# Altium PCB JacdacButton 10.PcbDoc
Units mm, origin at the board's own origin, x right, y up, seen from the top; angles counter-clockwise.
Board outline 14 x 28.2 mm, 2 copper layers (Top Layer, Bottom Layer), stack 1.525 mm thick; 22 components, 9 nets, 68 pads, 10 vias.
Unrouted connection lines stored in the file: 10.
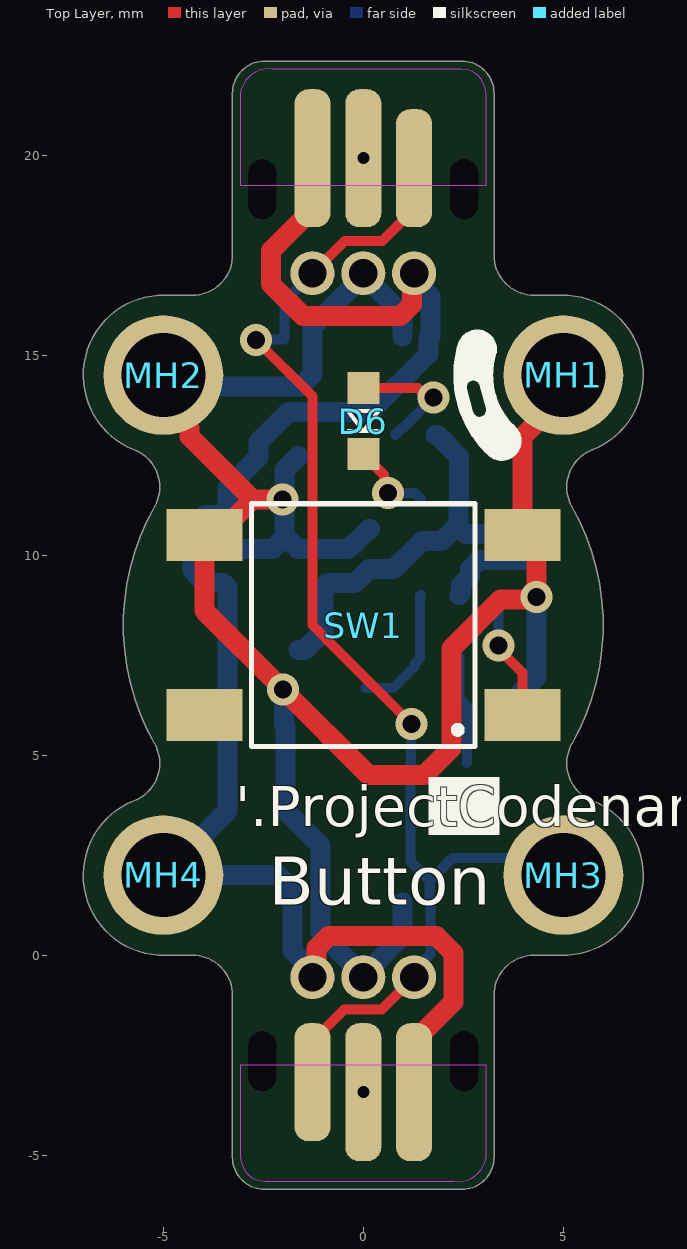
[diagram p0: Top Layer view]
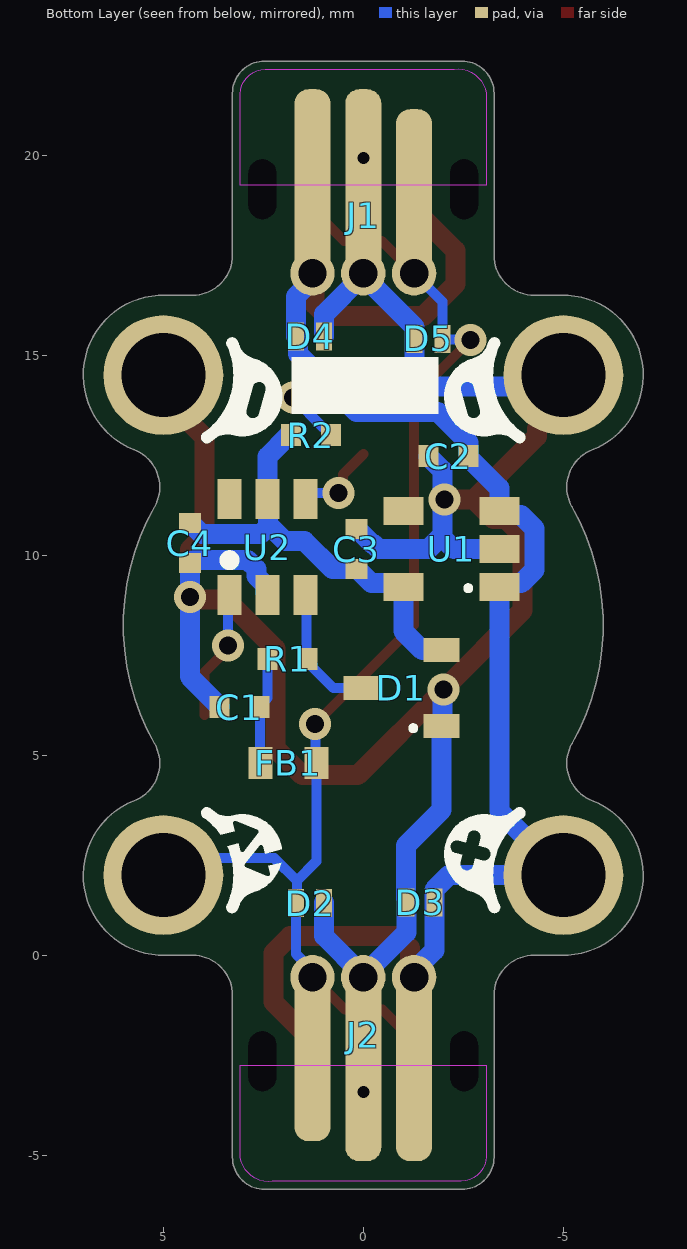
[diagram p1: Bottom Layer view, seen from below]

## Layer stack, top to bottom
Top Solder: solder mask 0.0102, Solder Resist, Dk 3.5
Top Layer: signal copper 0.0356
Dielectric 1: core 1.454, FR-4, Dk 4.2
Bottom Layer: signal copper 0.0356
Bottom Solder: solder mask 0.0102, Solder Resist, Dk 3.5

## Board outline
-4.95,0 -4.27,0 cw(c-4.27,-1) -3.27,-1 -3.27,-5.05 ccw(c-2.471,-5.051) -2.47,-5.85 2.47,-5.85 ccw(c2.471,-5.051) 3.27,-5.05 3.27,-1 cw(c4.27,-1) 4.27,0 4.95,0 ccw(c5,2) 5.726,3.864 cw(c6.089,4.796) 5.219,5.29 ccw(c0,8.25) 5.219,11.21 cw(c6.089,11.704) 5.726,12.636 ccw(c5,14.5) 4.95,16.5 4.27,16.5 cw(c4.27,17.5) 3.27,17.5 3.27,21.55 ccw(c2.471,21.551) 2.47,22.35 -2.47,22.35 ccw(c-2.471,21.551) -3.27,21.55 -3.27,17.5 cw(c-4.27,17.5) -4.27,16.5 -4.95,16.5 ccw(c-5,14.5) -5.726,12.636 cw(c-6.089,11.704) -5.219,11.21 ccw(c0,8.25) -5.219,5.29 cw(c-6.089,4.796) -5.726,3.864 ccw(c-5,2)

## Design rules (kind name [scope] priority, off if disabled: settings)
AssemblyTestPointUsage [All] p1: valid=2
BoardOutlineClearance [All] p1: gap=0.3 ignorepadtopadclearanceinfootprint=FALSE except(0: Arc-SplitContinuation Track-SplitContinuation SMDPad-SplitContinuation THPad-SplitContinuation Via-SplitContinuation Fill-SplitContinuation Poly-SplitContinuation Region-OutlineEdge Region-SplitContinuation Text-OutlineEdge Text-SplitContinuation; 0.2: Track-OutlineEdge Fill-CavityEdge Fill-CutoutEdge Fill-SplitBarrior Poly-CavityEdge Poly-CutoutEdge Poly-SplitBarrior Text-CavityEdge Text-CutoutEdge Text-SplitBarrior; 0.25: SMDPad-OutlineEdge)
Clearance [All] p1: gap=0.125 ignorepadtopadclearanceinfootprint=FALSE except(0: Arc-Hole Track-Hole SMDPad-Hole THPad-Hole Via-Hole Fill-Hole Poly-Hole Region-Hole Text-Hole)
ComponentClearance [All] p1: gap=0.1 collisioncheckmode=3 verticalgap=0.254 showdistances=FALSE
DiffPairsRouting [All] p1: maxlimit=2 minlimit=0.15 mostfreqgap=0.15 toplayer_minwidth=0.15 toplayer_maxwidth=2 toplayer_prefwidth=0.15 bottomlayer_minwidth=0.15 bottomlayer_maxwidth=2 bottomlayer_prefwidth=0.15 substack1={CB9D278B-8BF5-444A-AAF4-837A2A9DF42D} toplayer_{cb9d278b-8bf5-444a-aaf4-837a2a9df42d}_minwidth=0.381 toplayer_{cb9d278b-8bf5-444a-aaf4-837a2a9df42d}_maxwidth=0.381 toplayer_{cb9d278b-8bf5-444a-aaf4-837a2a9df42d}_prefwidth=0.381 bottomlayer_{cb9d278b-8bf5-444a-aaf4-837a2a9df42d}_minwidth=0.381 bottomlayer_{cb9d278b-8bf5-444a-aaf4-837a2a9df42d}_maxwidth=0.381 bottomlayer_{cb9d278b-8bf5-444a-aaf4-837a2a9df42d}_prefwidth=0.381 substack2={826B8647-A721-4255-895A-19F9591B9CD1} toplayer_{826b8647-a721-4255-895a-19f9591b9cd1}_minwidth=0.381 toplayer_{826b8647-a721-4255-895a-19f9591b9cd1}_maxwidth=0.381 toplayer_{826b8647-a721-4255-895a-19f9591b9cd1}_prefwidth=0.381 bottomlayer_{826b8647-a721-4255-895a-19f9591b9cd1}_minwidth=0.381 bottomlayer_{826b8647-a721-4255-895a-19f9591b9cd1}_maxwidth=0.381 bottomlayer_{826b8647-a721-4255-895a-19f9591b9cd1}_prefwidth=0.381 substack3={E64FCAF4-1BC8-437D-B1E0-0E5F2DC0F59E} toplayer_{e64fcaf4-1bc8-437d-b1e0-0e5f2dc0f59e}_minwidth=0.381 toplayer_{e64fcaf4-1bc8-437d-b1e0-0e5f2dc0f59e}_maxwidth=0.381 toplayer_{e64fcaf4-1bc8-437d-b1e0-0e5f2dc0f59e}_prefwidth=0.381 bottomlayer_{e64fcaf4-1bc8-437d-b1e0-0e5f2dc0f59e}_minwidth=0.381 bottomlayer_{e64fcaf4-1bc8-437d-b1e0-0e5f2dc0f59e}_maxwidth=0.381 bottomlayer_{e64fcaf4-1bc8-437d-b1e0-0e5f2dc0f59e}_prefwidth=0.381 substack4={E61CE66C-507C-4E1E-8E83-C905434AFC1C} toplayer_{e61ce66c-507c-4e1e-8e83-c905434afc1c}_minwidth=0.381 toplayer_{e61ce66c-507c-4e1e-8e83-c905434afc1c}_maxwidth=0.381 toplayer_{e61ce66c-507c-4e1e-8e83-c905434afc1c}_prefwidth=0.381 bottomlayer_{e61ce66c-507c-4e1e-8e83-c905434afc1c}_minwidth=0.381 bottomlayer_{e61ce66c-507c-4e1e-8e83-c905434afc1c}_maxwidth=0.381 bottomlayer_{e61ce66c-507c-4e1e-8e83-c905434afc1c}_prefwidth=0.381 maxuncoupledlength=25
FabricationTestPointUsage [All] p1: valid=2 allowmultiple=FALSE
HoleSize [All] p1: absolutevalues=TRUE maxlimit=2.54 minlimit=0.2 maxpercent=80.000 minpercent=20.000
MinimumSolderMaskSliver [All] p1: minsoldermaskwidth=0.005
PlaneClearance [All] p1: clearance=0.3
PlaneConnect [All] p1: planeconnectstyle=Relief reliefexpansion=0.5 reliefentries=4 reliefconductorwidth=0.2 reliefairgap=0.3
PolygonConnect "PolygonConnect GND" [isVIA] p1: connectstyle=Relief reliefconductorwidth=0.2 reliefentries=4 polygonreliefangle="90 Angle" airgapwidth=0.2
PolygonConnect [All] p2: connectstyle=Relief reliefconductorwidth=0.2 reliefentries=4 polygonreliefangle="90 Angle" airgapwidth=0.2
RoutingVias [All] p1: holewidth=0.3 width=0.6 viastyle="Through Hole" minholewidth=0.3 minwidth=0.6 maxholewidth=0.5 maxwidth=0.8
SilkToSilkClearance [All] p1: silktosilkclearance=0.001
SilkToSolderMaskClearance [IsPad] p1: minsilkscreentomaskgap=0.05 clearancetoexposedcopper=TRUE
SolderMaskExpansion [All] p1: expansion=0.075 istentingtop=FALSE
Width [All] p1: maxlimit=2 minlimit=0.15 preferedwidth=0.15 substack1={CB9D278B-8BF5-444A-AAF4-837A2A9DF42D} substack2={826B8647-A721-4255-895A-19F9591B9CD1} substack3={E64FCAF4-1BC8-437D-B1E0-0E5F2DC0F59E} substack4={E61CE66C-507C-4E1E-8E83-C905434AFC1C} minimp=50.000000 maximp=50.000000 favimp=50.000000
20 further rules are at their usual default settings.

## Components (designator, comment, footprint, x,y, rotation, side; value= is the part's Value field where it differs from the comment)
C1 "CL05C330JB5NNNC" "C0402_0.55MM - without outline" 3.1,6.2 r180 bottom
C2 "CL05A105KP5NNNC" "C0402_0.55MM - without outline" -2.125,12.475 r180 bottom
C3 "CL05A105KP5NNNC" "C0402_0.55MM - without outline" 0.17,10.15 r270 bottom
C4 "CL05A105KP5NNNC" "C0402_0.55MM - without outline" 4.335,10.3 r90 bottom
D1 "BAT54S" "NXP-BAT54S-TO-236AB - WITHOUT OUTLINE" -0.95,6.675 r0 bottom
D2 "RCLAMP0521P-N" "TVS 0402 - L" 1.327,1.3 r180 bottom
D3 "RCLAMP0521P-N" "TVS 0402 - L" -1.425,1.319 r0 bottom
D4 "RCLAMP0521P-N" "TVS 0402 - L" 1.329,15.463 r180 bottom
D5 "RCLAMP0521P-N" "TVS 0402 - L" -1.625,15.409 r0 bottom
D6 "Everlight Elec'''" "0603 Orange - without outline" 0,13.35 r90 top
FB1 "TDK MPZ1608S102ATA00" "TDK MPZ1608 0.8mm - without outline" 1.875,4.8 r0 bottom
J1 "3 pin JACDAC edge connector" JACDAC_EDGE_CONNECTOR_NO_TRACES 0,16.5 r180 bottom
J2 "3 pin JACDAC edge connector" JACDAC_EDGE_CONNECTOR_NO_TRACES 0,0 r0 bottom
MH1 "MH_5.0MMK_3.0MMC_2.1MMD_PTH" MH_5.0MMK_3.0MMC_2.1MMD_PTH 5,14.5 r0 top
MH2 "MH_5.0MMK_3.0MMC_2.1MMD_PTH" MH_5.0MMK_3.0MMC_2.1MMD_PTH -5,14.5 r180 top
MH3 "MH_5.0MMK_3.0MMC_2.1MMD_PTH" MH_5.0MMK_3.0MMC_2.1MMD_PTH 5,2 r0 top
MH4 "MH_5.0MMK_3.0MMC_2.1MMD_PTH" MH_5.0MMK_3.0MMC_2.1MMD_PTH -5,2 r180 top
R1 "RC0402FR-07220RL" "R0402 - Without outline" 1.9,7.4 r0 bottom
R2 "RC0402FR-071KL" "R0402 - Without outline" 1.312,13 r0 bottom
SW1 "Tact Wurth 430152050826" "Wurth 430152050836-WIDE" 0,8.25 r180 top
U1 "LDO 3.3V/300 mA" "ON_SEMI-SOT23-5 - WITHOUT OUTLINE" -2.2,10.15 r0 bottom
U2 "PMS150C" SOT23-6 2.395,10.2 r90 bottom

## Footprints (in the part's own frame and the unit in brackets; to place one, negate y for a bottom-side part, rotate by r counter-clockwise, add the part's x,y. Pads: shape width x height; smd on the part's side, far side on the other; paste and mask are expansions set on the pad)
"0603 Orange - without outline" [mm]
  rect 0.8x0.8 smd paste-0.05: 1(-0.825,0) 2(0.825,0)
  silkscreen extent -0.25,-0.38 0.25,0.38, body extent -0.8,-0.4 0.8,0.4, height 0.54
"C0402_0.55MM - without outline" [mm]
  rect 0.5x0.55 smd: 1(-0.5,0) 2(0.5,0)
  body extent -0.5,-0.25 0.5,0.25, height 0.55
JACDAC_EDGE_CONNECTOR_NO_TRACES [mm] "JacDac 3 pin connector with no traces"
  rrect78% 0.9x2.95 smd far side paste-1 mask+0: 1(-1.27,3.175)
  round 1.11 / inner round 0.71 / far side round 1.1 hole 0.71 paste-0.254 mask+0: 1(1.27,0.55) 2(0,0.55) 3(-1.27,0.55)
  rrect78% 0.9x4.3 smd paste-1 mask+0: 1(1.27,2.5)
  rrect78% 0.9x4.8 smd paste-1 mask+0: 2(0,2.75) 3(-1.27,2.75)
  rrect78% 0.9x3.45 smd far side paste-1 mask+0: 2(0,3.425) 3(1.27,3.425)
  round 0 hole 0.7 slot 1.5 at 90 deg unplated: ""(-2.52,2.65) ""(2.52,2.65)
  Top Layer keep-out region: -3.075,2.75 -3.07,5.033 -2.987,5.341 -2.761,5.567 -2.453,5.65 -2.453,5.65 2.27,5.65 2.545,5.635 2.794,5.516 2.978,5.31 3.07,5.05 3.07,5.05 3.07,2.75
  Bottom Layer lines w0.2: -1.126,0.85 -1.27,0.85
  Bottom Layer keep-out region: -3.07,2.75 -3.07,5.033 -3.023,5.269 -2.889,5.469 -2.689,5.603 -2.453,5.65 -2.453,5.65 2.27,5.65 2.545,5.635 2.794,5.516 2.978,5.31 3.07,5.05 3.07,5.05 3.07,2.75
MH_5.0MMK_3.0MMC_2.1MMD_PTH [mm] "Mounting Hole 5.0mm clearance, 3.1 annualar ring and 2.1mm PTH"
  round 3 hole 2.1 mask+0.05: 1(0,0)
"NXP-BAT54S-TO-236AB - WITHOUT OUTLINE" [mm] "SOT23, 3-Leads, Body 2.90x2.30mm, Pitch 0.95mm, IPC Medium Density"
  rect 0.9x0.6 smd: 1(-1,0.95) 2(-1,-0.95) 3(1,0)
  silkscreen extent -0.35,0.95 -0.25,1.05, body extent -1.32,-1.5 1.32,1.5, height 1.12
"ON_SEMI-SOT23-5 - WITHOUT OUTLINE" [mm]
  rect 1x0.7 smd: 1(-1.2,0.95) 2(-1.2,0) 3(-1.2,-0.95) 4(1.2,-0.95) 5(1.2,0.95)
  silkscreen extent -0.47,0.93 -0.38,1.02, body extent -1.5,-1.57 1.5,1.58, height 1.1
"R0402 - Without outline" [mm]
  rect 0.5x0.55 smd: 1(-0.5,0) 2(0.5,0)
  body extent -0.5,-0.25 0.5,0.25, height 0.35
SOT23-6 [mm] "SOT23, 6-Leads, Body 2.90x2.45mm, Pitch 0.95mm, IPC Medium Density"
  rect 1x0.6 smd: 1(-1.2,0.95) 2(-1.2,0) 3(-1.2,-0.95) 4(1.2,-0.95) 5(1.2,0) 6(1.2,0.95)
  silkscreen extent -0.42,0.85 -0.23,1.05, body extent -1.4,-1.45 1.4,1.45, height 1.45
"TDK MPZ1608 0.8mm - without outline" [mm]
  rect 0.6x0.8 smd paste-0.1: 1(-0.7,0) 2(0.7,0)
  body extent -0.8,-0.4 0.8,0.4, height 0.8
"TVS 0402 - L" [mm] "TVS 0402 RoHS"
  rect 0.4x0.7 smd paste-0.038 mask+0.05: 1(-0.35,0) 2(0.35,0)
  body extent -0.5,-0.3 0.5,0.3, height 0.5
"Wurth 430152050836-WIDE" [mm] "6*6mm vertical type, SMD, height 5.0mm, black actuator, 160gf, T&R"
  rect 1.9x1.3 smd: 1(-3.975,2.25) 2(-3.975,-2.25) 3(3.975,2.25) 4(3.975,-2.25)
  silkscreen extent -2.79,-3.04 2.79,3.04, body extent -4.5,-3.1 4.5,3.1, height 5

## Part data
C1: "CAP CER 33PF 50V C0G/NP0 0402", Capacitance=33pF, Case Code (Imperial)=0402, Case Code (Metric)=1005, Dielectric=C0G, Manufacturer=Samsung, Max Operating Temperature=125°C, Min Operating Temperature=-55°C, Package Quantity=1, Supplier Part Number 1=1276-1272-1-ND, Temperature Coefficient=300ppm/°C, Tolerance=5%, Voltage=50V, Case/Package=0402, Category="Ceramic Capacitors", ComponentLink1Description="Online datasheet", ComponentLink1URL=https://datasheet.ciiva.com/15195/getdatasheetpartid-355282-15195687.pdf, Construction=Flat, Contact Plating=Tin, Depth=0.5mm, Height=0.5mm, Lead Free="Lead Free", Length=1mm, Manufacturer Part Number=CL05C330JB5NNNC, Material=Ceramic, Mount="Surface Mount", Packaging="Tape and Reel", Pricing 1="1=0.10000, 10=0.02300, 50=0.01260, 100=0.01040, 500=0.00740, 1000=0.00582, 2500=0.00529, 5000=0.00487 (USD)", Pricing 2="1=0.12500, 25=0.02900, 100=0.01300, 250=0.01100, 500=0.00900, 1000=0.00600 (USD)", Pricing 3="1=0.10000, 10=0.01400, 50=0.01400, 100=0.01100, 1000=0.00600, 10000=0.00400 (USD)", Pricing 4="150=0.01120, 500=0.00860, 2500=0.00640, 5000=0.00550 (GBP)", Radiation Hardening=No, RoHS=Yes, RoHS Compliant=Yes, Series=CL, Stock 1=5436088, Stock 2=45340, Stock 3=8877, Stock 4=10934, Supplier 1=Digi-Key, Supplier 2=Newark, Supplier 3=Mouser, Supplier 4=Farnell, Supplier Part Number 2=82AC9259, Supplier Part Number 3=187-CL05C330JB5NNNC, Supplier Part Number 4=3013373RL, Thickness=0.022inch, Voltage Rating=50V, Voltage Rating (DC)=50V, Width=0.02inch
C2 C3 C4: "CAP CER 1UF 10V X5R 0402", Capacitance=1µF, Case Code (Imperial)=0402, Case Code (Metric)=1005, Dielectric=X5R, Manufacturer=Samsung, Max Operating Temperature=85°C, Min Operating Temperature=-55°C, Package Quantity=1, Supplier Part Number 1=1276-1076-1-ND, Tolerance=10%, Voltage Rating=10V, Case/Package=0402, Category=Capacitors, Checked=?, ComponentLink1Description="Online datasheet", ComponentLink1URL=https://datasheet.ciiva.com/15195/getdatasheetpartid-358390-15195630.pdf, Contact Plating=Tin, Created=DG, Depth=0.5mm, Height=0.5mm, Length=1mm, Manufacturer Part Number=CL05A105KP5NNNC, Material=Ceramic, Mount="Surface Mount", Packaging="Tape and Reel", Pricing 1="1=0.10000, 10=0.03900, 50=0.02100, 100=0.01720, 500=0.01228, 1000=0.00965, 2500=0.00877, 5000=0.00807 (USD)", Pricing 2="1=0.10000, 10=0.04200, 100=0.01800, 500=0.01300, 1000=0.01000, 2500=0.00900 (USD)", Pricing 3="10=0.02450, 100=0.02000, 500=0.01310, 2500=0.00920, 5000=0.00810, 10000=0.00640, 50000=0.00490 (GBP)", Radiation Hardening=No, RoHS=Yes, Stock 1=5705569, Stock 2=928941, Stock 3=53670, Supplier 1=Digi-Key, Supplier 2=Mouser, Supplier 3=Farnell, Supplier Part Number 2=187-CL05A105KP5NNNC, Supplier Part Number 3=3013329, Thickness=0.022inch, Width=0.02inch
D1: "DIODE ARRAY SCHOTTKY 30V SOT23", Manufacturer=Nexperia, Manufacturer Part Number=BAT54S,235, Supplier Part Number 1=1727-1868-1-ND, Category="Rectifier Diodes", ComponentLink1Description="NXP datasheet online", ComponentLink1URL=https://assets.nexperia.com/documents/data-sheet/BAT54_SER.pdf, Pricing 1="1=0.13000, 10=0.11900, 100=0.05610, 500=0.03326, 1000=0.02185, 5000=0.02138 (USD)", RoHS=No, Stock 1=14011, Supplier 1=Digi-Key, Supplier 2=Mouser, Supplier 3=RSComponents, Supplier Part Number 2=771-BAT54S235, Supplier Part Number 3=1707990
D2 D3 D4 D5: "Bidirectional 5V (Max) 6V 16V 3.5A (8/20us) 0402 TVS RoHS", Manufacturer="Born Semiconductor", Package=0402, Supplier1 Part Number=C316043, Checked By=?, ComponentLink1Description="Online datasheet", ComponentLink1URL=https://datasheet.lcsc.com/szlcsc/Bourne-Semicon-Shenzhen-RCLAMP0521P-N_C316043.pdf, Created By="D Gakure", Manufacturer Part Number=RCLAMP0521P-N, Supplier1=LCSC
D6: library part 19-217/S2C-AQ1R1B/3T, "LED ORANGE DIFFUSED 1608 SMD", Case Code (Imperial)=0603, Case Code (Metric)=1608, Color=Orange, Forward Voltage=2.05V, Lens Color=White, Manufacturer="Everlight Elec", Supplier 1 Part Number=C146215, Test Current=25mA, Case/Package=0603, Category=LEDs, Colour=Orange, ComponentLink1Description="Online datasheet", ComponentLink1URL=https://datasheet.lcsc.com/lcsc/1912171731_Everlight-Elec-19-217-S2C-AQ1R1B-3T_C146215.pdf, Dominant Wavelength=605nm, Height=0.65mm, Lead Free="Lead Free", Length=1.6mm, Lens Transparency=Diffused, Luminous Intensity=100mcd, Manufacturer Part Number=19-217/S2C-AQ1R1B/3T, Mount="Surface Mount", RoHS=Yes, Supplier 1=LCSC, Width=0.8mm
FB1: "0603 1k@100MHz 0.8A chip", Case Code (Imperial)=0603, Case Code (Metric)=1608, Current Rating=800mA, DC Resistance (DCR)=300mR, Manufacturer=TDK, Manufacturer Part Number=MPZ1608S102ATA00, Package Quantity=4000, Supplier Part Number 1=445-8694-1-ND, Tolerance=25%, Case/Package=0603, ComponentLink2Description="datasheet online", ComponentLink2URL=https://www.mouser.co.uk/datasheet/2/400/eads_commercial_power_mpz1608_en-923650.pdf, ComponentLink3Description=datasheet, ComponentLink3URL="Y:\System\Altium\Libraries 2014\TDK\Datasheets\eads_commercial_power_mpz1608_en-923650.pdf", Core Material=Ferrite, Height=0.037inch, Impedance="1kR @ 100MHz", Length=0.063inch, Max DC Current=800mA, Mount="Surface Mount", Packaging="Tape and Reel", Pricing 1="1=0.1, 10=0.079, 25=0.0716, 50=0.0644, 100=0.0472, 250=0.03432, 500=0.03146, 1000=0.02717 (USD)", Stock 1=113542, Supplier 1=Digi-Key, Supplier 2=Mouser, Supplier Part Number 2=810-MPZ1608S102ATA00, Width=0.031inch
J1 J2: library part "Jacdac edge connector", "3 pin Jacdac edge connector 1.27mm pitch", Manufacturer Part Number=JACDAC_EDGE_CONNECTOR, Checked By=?, ComponentLink1Description="Yuliang JACDAC cable connector drawing online", ComponentLink1URL=https://github.com/microsoft/jacdac-mdk/blob/main/connector/JACDAC-Connector-by-Yuliang-2020-11-28.pdf, ComponentLink2Description="JACDAC PCB edge connector spec onlin", ComponentLink2URL=https://github.com/microsoft/jacdac-mdk/blob/main/connector/JACDAC_PCB_Edge_Connector_Drawing_JD-PEC-01_rev_01.pdf, Created By="D. Gakure", PCB Type="1.6mm FR4"
MH1 MH2 MH3 MH4: "Mounting Hole 5.0mm keepout, 3.0mm annualar ring and 2.1mm Drill PTH"
R1: "RES SMD 220 OHM 1% 1/16W 0402", Case Code (Imperial)=0402, Case Code (Metric)=1005, Manufacturer=Yageo, Max Operating Temperature=155°C, Max Power Dissipation=63mW, Min Operating Temperature=-55°C, Package Quantity=1, Power Rating=62.5mW, Resistance=220R, Resistor Type="Thick Film", Supplier Part Number 1=311-220LRCT-ND, Temperature Coefficient=100ppm/°C, Tolerance=1%, Voltage Rating=50V, Case/Package=0402, Category=Resistors, Checked=?, ComponentLink1Description="Online datasheet", ComponentLink1URL=https://datasheet.ciiva.com/11819/0900766b80c66297-11819466.pdf, Created=D.G, Depth=0.5mm, Features="Moisture Resistant", Height=0.016inch, Lead Free="Lead Free", Length=1mm, Manufacturer Part Number=RC0402FR-07220RL, Military Standard=Not, Number of Pins=2, Number of Terminations=2, Packaging="Tape and Reel", Pricing 1="1=0.10000, 10=0.01400, 100=0.00580, 1000=0.00262, 2500=0.00228, 5000=0.00188 (USD)", Pricing 2="1=0.10000, 10=0.01200, 100=0.00400, 1000=0.00400, 2500=0.00400, 10000=0.00300 (USD)", Pricing 3="1=0.08130, 25=0.01210, 100=0.01120, 250=0.01030, 500=0.00900 (GBP)", REACH SVHC="No SVHC", RoHS=Yes, Stock 1=1286042, Stock 2=324625, Stock 3=18234, Supplier 1=Digi-Key, Supplier 2=Mouser, Supplier 3=Farnell, Supplier Part Number 2=603-RC0402FR-07220RL, Supplier Part Number 3=2147864, Termination=SMD/SMT, Voltage Rating (DC)=50V, Width=0.02inch
R2: "RES SMD 1K OHM 1% 1/16W 0402", Case Code (Imperial)=0402, Case Code (Metric)=1005, Manufacturer=Yageo, Max Operating Temperature=155°C, Min Operating Temperature=-55°C, Power Rating=62.5mW, Resistance=1kR, Resistor Type="Thick Film", Supplier Part Number 1=311-1.00KLRDKR-ND, Temperature Coefficient=100ppm/°C, Tolerance=1%, Voltage Rating=50V, Case/Package=0402, Category=Resistors, Checked=?, ComponentLink2Description="Online datasheet", ComponentLink2URL=https://datasheet.ciiva.com/12666/pyu-rc0402-51-rohs-l-6-r-12666741.pdf, Created=D.G, Depth=0.5mm, Height=0.32mm, Lead Free="Lead Free", Length=1mm, Manufacturer Part Number=RC0402FR-071KL, Military Standard=Not, Number of Pins=2, Packaging="Tape and Reel", Pricing 1="1=0.10000, 10=0.01400, 100=0.00580, 1000=0.00262, 2500=0.00228, 5000=0.00188 (USD)", Pricing 2="1=0.10000, 10=0.01200, 100=0.00400, 1000=0.00400, 2500=0.00400, 10000=0.00300 (USD)", Pricing 3="1=0.08130, 25=0.01210, 100=0.01120, 250=0.01030, 500=0.00900 (GBP)", REACH SVHC=Unknown, RoHS=Yes, Stock 1=37591306, Stock 2=11912978, Stock 3=29900, Supplier 1=Digi-Key, Supplier 2=Mouser, Supplier 3=Farnell, Supplier Part Number 2=603-RC0402FR-071KL, Supplier Part Number 3=2132441, Termination=SMD/SMT, Voltage Rating (DC)=50V, Width=0.5mm
SW1: "6x6mm SPST 0.05A 12VDC SMD 260gf", Contact Current Rating=50mA, Manufacturer="Wurth Electronics", Manufacturer Part Number=430152050826, Max Operating Temperature=85°C, Min Operating Temperature=-40°C, Operating Force=260gf, Supplier Part Number 1=732-6993-1-ND, Actuator Length=1.6mm, Actuator Material="Polymer,Liquid Crystal Polymer", Actuator Type=Standard, ComponentLink1Description="Online datasheet", ComponentLink1URL=http://www.farnell.com/datasheets/1910150.pdf, Contact Material="Stainless Steel,Steel", Current Rating=50mA, Height=5mm, Illumination Type=Non-Illuminated,Illuminated, Length=6.2mm, Mechanical Life=200000Cycles, Mount="Surface Mount", Packaging="Tape and Reel", Pricing 1="1=0.47, 500=0.38232 (USD)", REACH SVHC="No SVHC", Stock 1=2282, Supplier 1=Digi-Key, Supplier 2=Farnell, Supplier 3=RSComponents, Supplier Part Number 2=2065110, Supplier Part Number 3=7856213, Switch Function=Off-Mom, Switch Travel=0.25mm, Termination="Gull Wing", Throw Configuration=SPST, Width=6.2mm
U1: library part NCP114BSN330T1G, "CMOS Low Dropout Regulator (LDO), 300 mA 3.3V, Non-Active Discharge, TSOP5", Case/Package=TSOP, Manufacturer="ON Semiconductor", Max Input Voltage=5.5V, Max Operating Temperature=85°C, Max Output Current=300mA, Min Input Voltage=1.7V, Min Operating Temperature=-40°C, Output Voltage=3.3V, Quiescent Current=50uA, Supplier Part Number 1=NCP114BSN330T1GOSCT-ND, Accuracy=2%, Category="Voltage Regulators - Linear", ComponentLink1Description="Datasheet (online)", ComponentLink1URL=http://www.farnell.com/datasheets/2118270.pdf?src-supplier=Farnell, Lead Free="Lead Free", Manufacturer Part Number=NCP114BSN330T1G, Mount="Surface Mount", Number of Outputs=1, Number of Pins=5, Output Type=Fixed, Polarity=Positive, Pricing 1="1=0.45000, 10=0.33700, 25=0.29440, 100=0.19060, 250=0.15780, 500=0.12624, 1000=0.09679 (USD)", RoHS=Yes, RoHS Compliant=Yes, Stock 1=4067, Supplier 1=Digi-Key, Supplier 2=Mouser, Supplier 3=RSComponents, Supplier Part Number 2=863-NCP114BSN330T1G, Supplier Part Number 3=1263179
U2: "8bit OTP Type IO Controller", Manufacturer=PADAUK, Manufacturer Part Number=PMS150C-U6, Package=SOT-23-6, Supplier Part Number 1=C168658, ComponentLink1Description="Padauk datasheet online", ComponentLink1URL=http://www.padauk.com.tw/upload/doc/PMS15A,PMS150C%20datasheet%20V108_EN_20200724.pdf, Pricing 1="1=0.6, 10=0.0595, 100=0.0449", Stock 1=0, Supplier 1=LCSC, Supplier Order Qty 1=3000

## Via types
v1: diameter 0.8, hole 0.45, Top Layer to Bottom Layer, tented both sides, 8 vias
v2: diameter 0.6, hole 0.3, Top Layer to Bottom Layer, tented both sides, 2 vias

## Nets (pads, with @x,y where several pads share a name; then routed paths per layer and width w, separated by ;. In a path a pad name is that pad's centre, name@x,y a point inside that pad or via, vN(x,y) a via of type N, cw(c..) or ccw(c..) an arc to the next point about the centre after c; other vN are vias at no path point)
3V3: C3.2 C4.2 D1.2 R2.2 U1.5 U2.5 | length 10.6
  Bottom Layer w0.5: D1.2@-1.625,7.625 -1.475,7.625 -1,8.1 U1.5 -0.9,9.3 -0.205,9.3 0.145,9.65 C3.2 0.765,9.65 1.472,10.357 1.962,10.357 2.35,10.745 2.569,10.525 4.035,10.525 4.31,10.8 C4.2 ; R2.2 R2.2@1.837,13 ; R2.2@1.885,12.997 1.885,12.975 2.395,12.465 U2.5 ; 2.382,10.712 U2.5@2.382,11.387
BUTTON: SW1.1 U2.1 | length 3.1
  Top Layer w0.25: v1(3.375,7.745) 3.375,7.671 3.975,7.072 SW1.1
  Bottom Layer w0.25: U2.1@3.36,8.89 3.375,8.875 v1(3.375,7.745)
GND: C1.1 C2.1 C3.1 C4.1 D1.1 D2.2 D3.2 D4.2 D5.2 J1.2 J2.2 MH1.1 MH2.1 SW1.2 SW1.4 U1.2 U2.2 | length 59.5
  Top Layer w0.5: MH2.1 -5,13.824 -4.345,13.169 -4.345,12.973 -2.765,11.393 ; v1(-2.025,11.393) -2.765,11.393 ; MH1.1 5,13.982 3.975,12.957 SW1.2 4.337,10.138 v1(4.337,8.951) 4.28,8.894 3.428,8.894 2.2,7.666 2.2,5.175 1.525,4.5 0.138,4.5 v1(-2.005,6.643) -3.975,8.613 SW1.4 -3.575,10.9 -3.258,10.9 -2.765,11.393
  Bottom Layer w0.5: MH2.1 -4.721,14.221 -1.568,14.221 -1.275,14.514 -1.275,15.712 0,16.987 J1.2@0,17.005 ; U1.2 -2.27,10.15 -1.975,10.445 -1.975,10.5 ; v1(-2.025,11.393) -1.975,11.343 -1.975,10.5 ; v1(-2.005,6.643) -1.977,6.615 -1.977,5.752 D1.1 -1.95,3.625 -1.065,2.74 D3.2@-1.065,1.419 ; v1@-1.975,11.421 -1.975,12.125 -1.65,12.45 -1.625,12.45 C2.1 ; D3.2 -1.075,0.57 J2.2@0,-0.505 ; J2.2@0,-0.55 J2.2@0,-0.505 ; J1.2@0,17.05 J1.2@0,17.005 ; C3.1 0.145,10.65 -0.23,10.275 -0.26,10.275 -0.376,10.159 -1.634,10.159 -1.975,10.5 ; D4.2 0.979,16.026 J1.2@0,17.005 ; D2.2@0.983,1.319 0.983,0.478 J2.2@0,-0.505 ; U2.2 2.445,9.05 2.445,9.25 2.67,9.475 2.67,9.655 2.89,9.875 4.235,9.875 4.31,9.8 C4.1 C4.1 v1(4.337,8.951) 4.337,6.962 3.6,6.225 C1.1
  other v2: 0,-3.425 0,19.925
JD_DATA: D2.1 D5.1 FB1.1 J1.1 J2.1 MH3.1 | length 32.8
  Top Layer w0.25: v1(-2.679,15.383) -1.271,13.974 -1.271,8.254 -0.661,7.645 v1(1.203,5.78) ; J2.1@-1.27,-3.175 -1.27,-2.15 -0.481,-1.361 0.459,-1.361 J2.1@1.27,-0.55 ; J1.1@-1.27,17.05 -0.459,17.861 0.481,17.861 1.27,18.65 J1.1@1.27,19.675
  Bottom Layer w0.2: J2.1@1.27,-0.55 J2.1@1.329,-0.491
  Bottom Layer w0.25: v1(-2.679,15.383) -2.666,15.396 -1.988,15.396 D5.1 -1.975,16.345 J1.1@-1.27,17.05 ; v1(1.203,5.78) 1.189,5.766 1.189,4.814 FB1.1 1.175,2.347 1.66,1.863 ; J2.1@1.27,-0.55 1.27,-0.381 1.677,0.026 D2.1 ; D2.1@1.677,1.325 1.66,1.343 1.66,1.863 ; MH3.1 4.574,2.426 2.223,2.426 1.66,1.863
JD_DATA_MCU: D1.3 R1.1 U2.3 | length 3.3
  Bottom Layer w0.25: D1.3 0.745,6.675 1.275,7.205 1.275,7.275 R1.1 1.423,7.423 1.423,8.977 U2.3
JD_PWR: C2.2 D3.1 D4.1 J1.3 J2.3 MH4.1 U1.1 U1.3 | length 42.8
  Top Layer w0.5: J2.3@-1.27,-0.55 -1.164,-0.444 -1.164,0.182 -0.871,0.475 1.832,0.475 2.25,0.057 2.25,-1.17 1.27,-2.15 J2.3@1.27,-3.425 ; J1.3@-1.27,19.925 -1.27,18.65 -2.304,17.616 -2.304,16.776 -1.503,15.975 0.921,15.975 1.214,16.268 1.214,16.994 J1.3@1.27,17.05
  Bottom Layer w0.5: J2.3@-1.27,-0.55 -1.27,-0.385 -1.775,0.12 -1.775,1.635 -2.14,2 MH4.1 -3.4,3.6 U1.1 -3.5,9.3 -3.949,9.3 -4.275,9.626 -4.275,10.674 -3.949,11 -3.5,11 U1.3 -3.4,11.675 -2.625,12.45 -2.625,12.822 -1.872,13.575 0.17,13.575 1.629,15.033 1.629,15.413 D4.1 ; J1.3@1.27,17.05 1.27,16.885 1.686,16.469 D4.1@1.686,15.563
JD_STATUS: D6.1 U2.4 | length 2.1
  Top Layer w0.25: D6.1 0.512,12.013 0.512,11.667 v1(0.618,11.562)
  Bottom Layer w0.25: v1(0.618,11.562) 1.283,11.562 U2.4@1.434,11.411
NetC1_2: C1.2 FB1.2 R1.2 | length 2.8
  Bottom Layer w0.15: R1.2 R1.2@2.463,7.463
  Bottom Layer w0.25: R1.2 2.4,6.425 2.6,6.225 C1.2 2.588,6.188 2.588,4.812 FB1.2
NetD6_2: D6.2 R2.1 | length 3.2
  Top Layer w0.25: D6.2 1.365,14.175 1.597,13.943 v1(1.759,13.943)
  Bottom Layer w0.25: R2.1 0.812,13.025 0.962,13.175 0.987,13.175 1.755,13.943 v1(1.759,13.943)
pads on no net: J1. J2. SW1.3 U1.4 U2.6

## Silkscreen, mask and mechanical layers (free items; w line width, h text height)
Top Overlay:
  drawing of 2 lines, arcs and shapes, not listed
  text "'.ProjectCodenameID'-'.ProjectRevision'" at -3.2,3.225 h1
  text "Button" at -2.365,1.26 h1.2
Bottom Overlay:
  drawing of 5 lines, arcs and shapes, not listed
Dimension:
  the board outline again, w0.05
Board Outline:
  the board outline again, w0.2
Top Assy:
  the board outline again, w0.05
Bottom Assy:
  the board outline again, w0.05

## Dimensions
-2.47,-5.85 to -2.47,22.35 on Dimension
-7.001,2 to 7.001,2 on Dimension
-6,8.25 to 6,8.25 on Dimension
-3.27,-5.05 to 3.27,-5.05 on Dimension

## Text inside footprints (layer, text, board x,y; h text height)
J1: Alignment "board outline  / for 'innie'" at -4.53,14.519 h1.2; Alignment "board outline  / for 'outie'" at -5.14,17.364 h1.2; Mechanical 9 "Jacdac / cable connector  / body" at 4.821,26.508 h1.7
J2: Alignment "board outline  / for 'innie'" at 4.53,1.981 h1.2 r180; Alignment "board outline  / for 'outie'" at 5.14,-0.864 h1.2 r180; Mechanical 9 "Jacdac / cable connector  / body" at -4.821,-10.008 h1.7 r180
MH3: Assembly Notes "5mm dia keepout  / for traces and  / components to  / allow space for  / bushes/standoffs/ / nuts/screw heads" at 7.794,2.889 h0.5; Assembly Notes "board outline can  / be on 2.0mm   / radius if necessary" at 7.794,-1.556 h0.5